# Altium PCB Tigershark 3D R1.7.PcbDoc (part 4 of 4)
Units mil, origin at the board's own origin, x right, y up, seen from the top; angles counter-clockwise.
Board outline 5500 x 4600 mil, 4 copper layers (Top Layer, Groun Plane, Power Plane, Bottom Layer); 303 components, 232 nets, 993 pads, 850 vias.
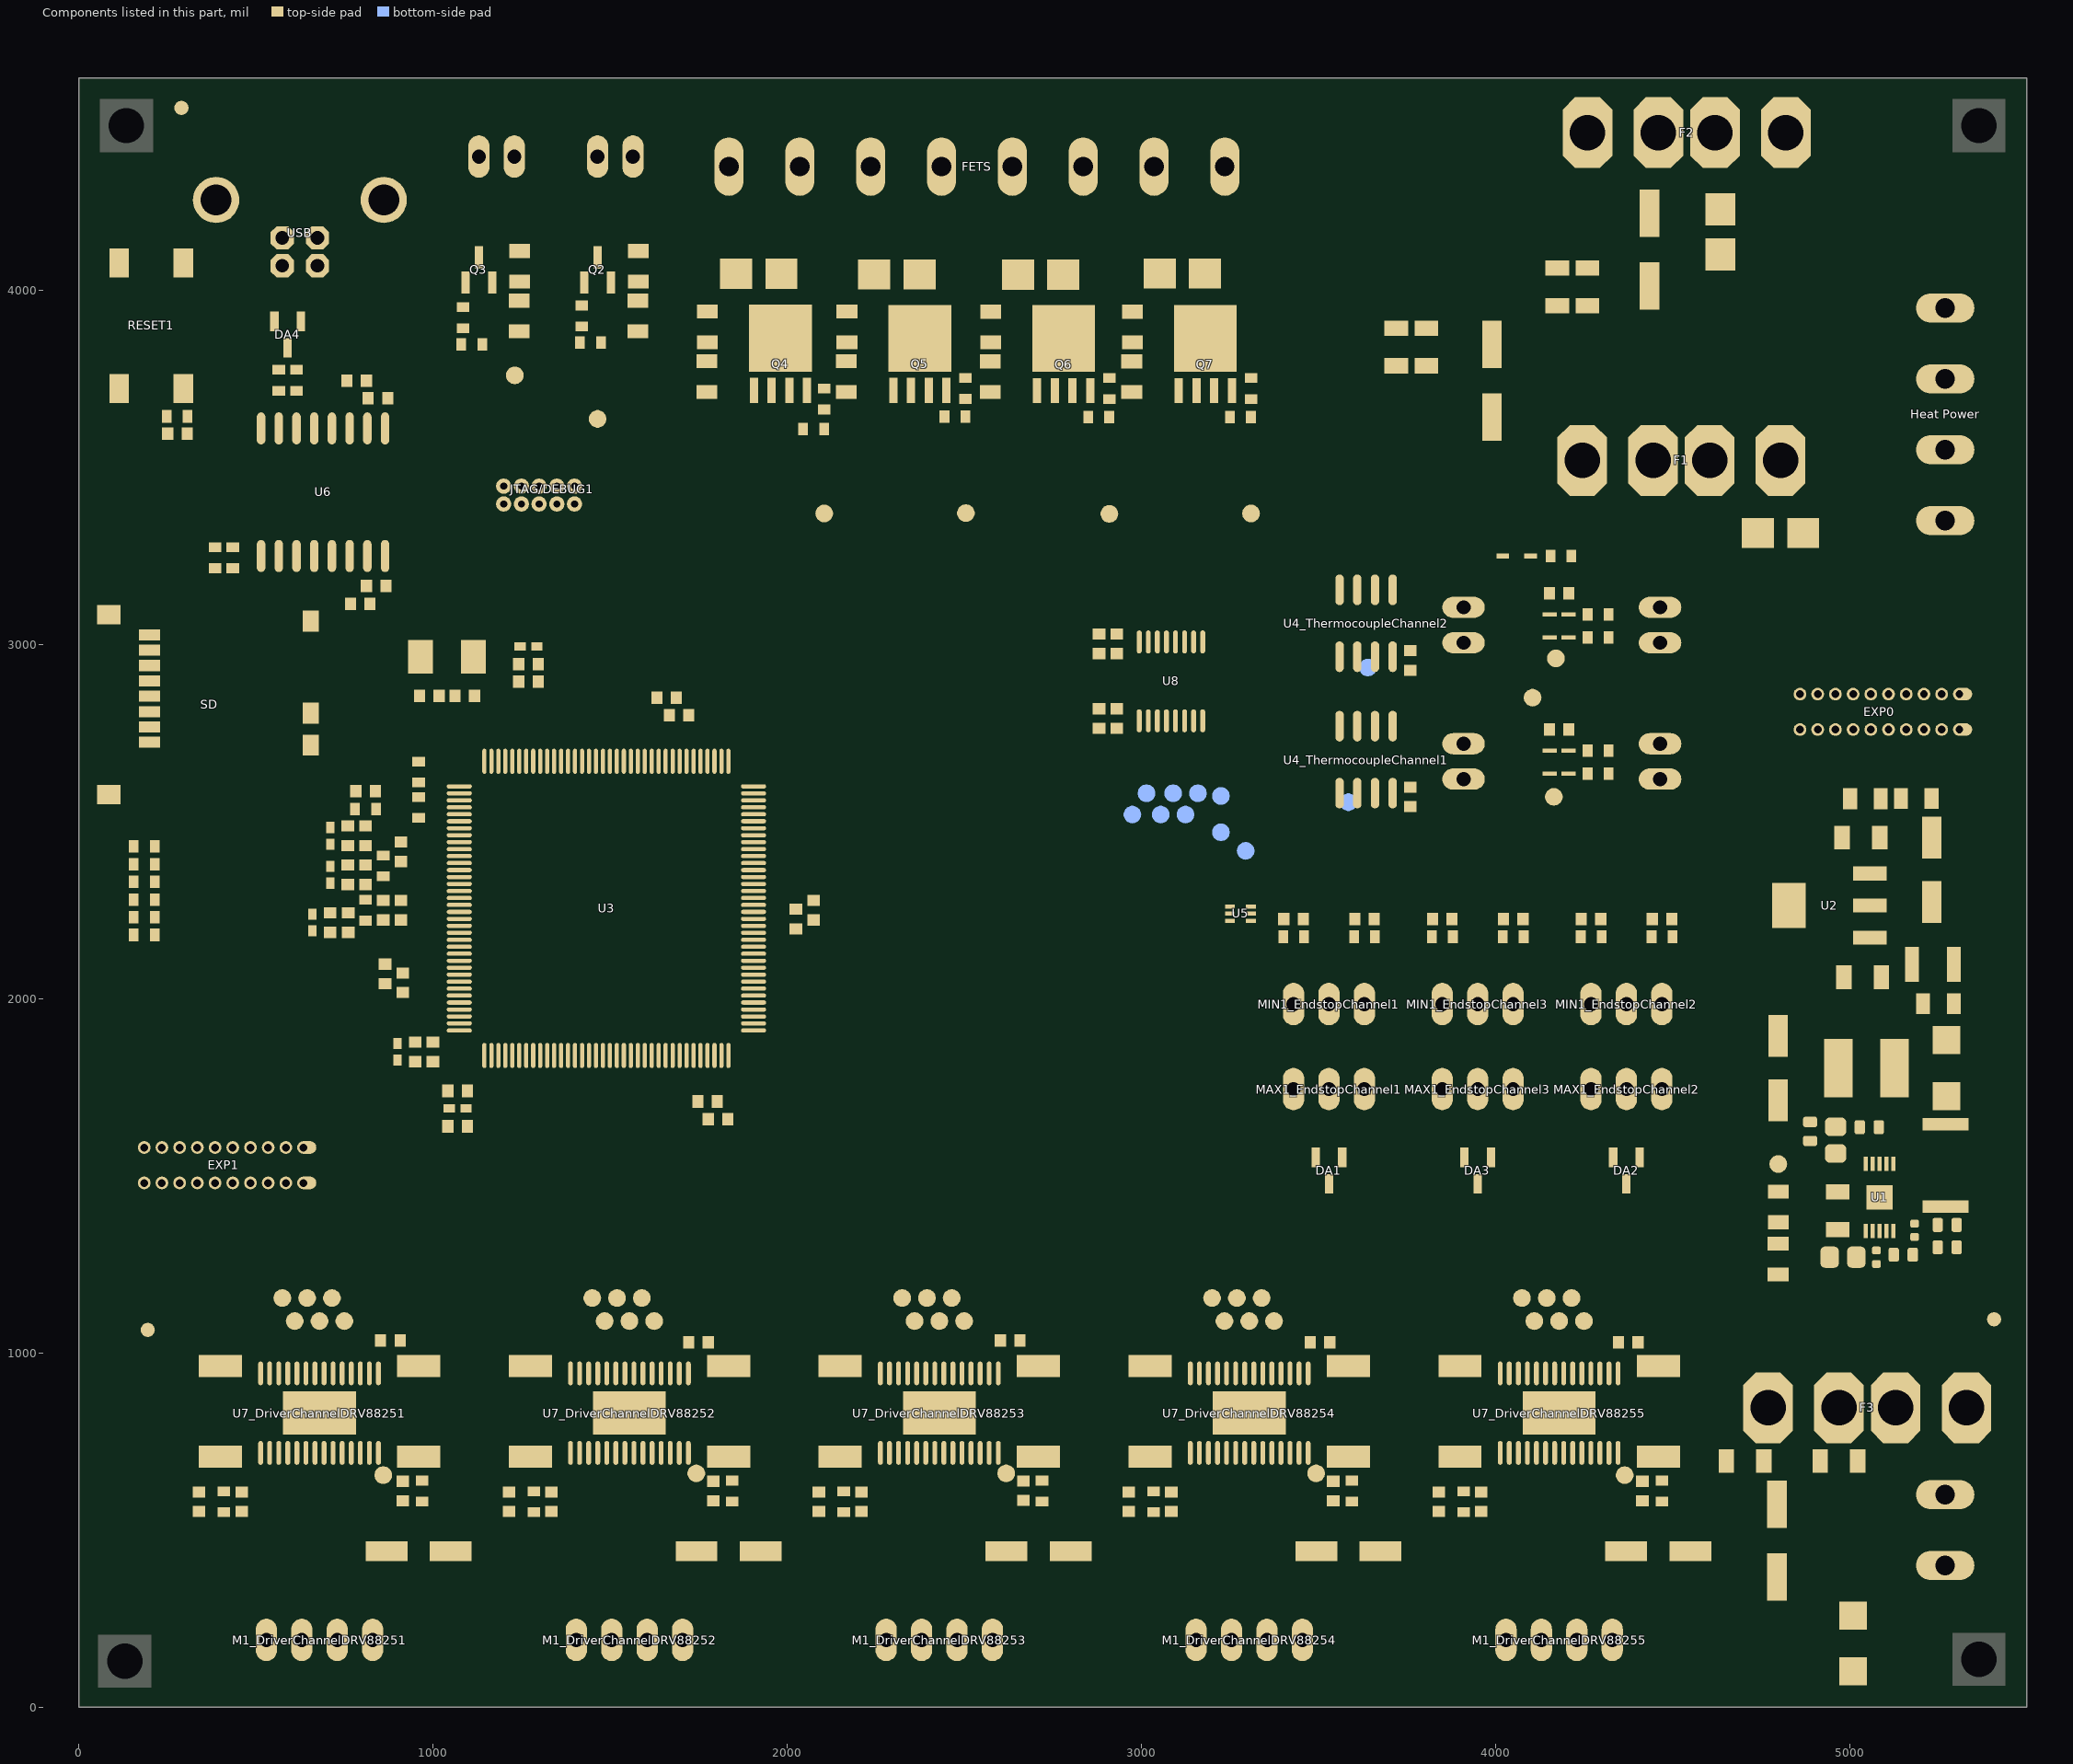
[diagram p6: the components of this part, seen from the top]

## Silkscreen, mask and mechanical layers (free items; w line width, h text height)
Top Overlay:
  lines w10: 40,40 40,220 220,220 220,40 195,40 40,40 ; 45,4375 200,4375 225,4375 225,4555 45,4555 45,4375 ; 5275,45 5455,45 5455,225 5275,225 5275,45 ; 5275,4375 5275,4555 5455,4555 5455,4375 5275,4375
  text "HEATBED" at 4730,4265 h120
  text "FAN-0" at 1025,4173.64 h120
  text "FAN-1" at 1360,4173.64 h120
  text "HEAT-0" at 1775,4125 h100
  text "HEAT-1" at 2160,4124 h100
  text "HEATBED" at 2971,4124.22 h100
  text "HEAT-2" at 2574,4123 h100
  text "HEATERS" at 3466,4065 h130 r90
  text "PWR IN 3" at 5036,3653 h100 r90
  text "12V - 24V" at 5106,3648 h100 r90
  text "AVR" at 75,3360 h160
  text "MOSFETS" at 4125,3335 h120
  text "PWR IN 2" at 5026,3253 h100 r90
  text "12V - 24V" at 5106,3253 h100 r90
  text "Thermocouples" at 3460,3225 h90
  text "Thermistors" at 4270,3220 h90
  text "USB Isolation" at 985,3195 h100 r90
  text "Smart Port" at 4707,2975 h155
  text "Tigershark 3D" at 2005,2350 h220
  text "Prototype Rev 1V7" at 2300,2285 h80
  text "X" at 3455,2255 h300
  text "Y" at 3870,2255 h300
  text "Z" at 4320,2255 h300
  text "Designed By Adam Vadala-Roth" at 2140,2210 h90
  text "3.3V LDO" at 5450,2080 h150 r90
  text "S" at 2450,1860 h2400
  text "G" at 2919,1854 h330
  text "S" at 2090,1835 h210
  text "GPIO Port" at 37,1690 h155
  text "ENDSTOPS" at 3317,1631 h120 r90
  text "MAX / MIN" at 4646,1611 h120 r90
  text "+5V DCDC" at 5460,1355 h150 r90
  text "PWR IN 2" at 5035,329.5 h90 r90
  text "12V - 24V" at 5100,329.5 h90 r90
  text "STEPPER DRIVERS" at 125,250 h130 r90
  text "2.5A Per Phase" at 215,250 h130 r90
  text "X" at 270,45 h300
  text "Y" at 1145,45 h300
  text "Z" at 2020,45 h300
  text "E" at 2890,45 h300
  text "0" at 3585,45 h300
  text "E" at 3780,45 h300
  text "1" at 4460,45 h300
Bottom Overlay:
  text "Tigershark 3D" at 4525,1515 h250
  text "Powered by TinyG" at 4520,1375 h140
  text "Based On the Work of Ultimachine," at 4500,1275 h140
  text "Arduino, RepRap, and Synthetos.com" at 4500,1160 h140
  text "Developed by Adam Vadala-Roth in" at 4500,1045 h140
  text "collaboration with Johnny Russel" at 4500,925 h140
  text "and Alden Hart" at 4500,810 h140
  text "G" at 3795,510 h310
  text "S" at 4195,510 h2000
  text "S" at 4515,490 h175
  text "#YOLO" at 4495,265 h200
Mechanical 15:
  lines w10: 0,0 0,4600 5500,4600 5500,760 5500,400 5500,0 0,0

## Text inside footprints (layer, text, board x,y; h text height)
FAN-1: Mechanical 16 "1" at 1627.5,4440.08 h62 r180
FAN-2: Mechanical 16 "1" at 1292.5,4440.08 h62 r180
FETS: Top Overlay "4" at 2336,4264.22 h77.5; Top Overlay "3" at 2136,4264.22 h77.5; Top Overlay "2" at 1936,4264.22 h77.5; Top Overlay "1" at 1751,4264.22 h77.5; Top Overlay "5" at 2536,4264.22 h77.5; Top Overlay "6" at 2736,4264.22 h77.5; Top Overlay "7" at 2936,4264.22 h77.5; Top Overlay "8" at 3136,4264.22 h77.5
"Heat Power": Top Overlay "4" at 5185,3450 h77.5 r270; Top Overlay "3" at 5185,3650 h77.5 r270; Top Overlay "2" at 5185,3850 h77.5 r270; Top Overlay "1" at 5185,4035 h77.5 r270
MAX1_EndstopChannel1: Mechanical 16 "1" at 3367.5,1682.5 h62
MAX1_EndstopChannel2: Mechanical 16 "1" at 4207.5,1682.5 h62
MAX1_EndstopChannel3: Mechanical 16 "1" at 3787.5,1682.5 h62
MIN1_EndstopChannel1: Mechanical 16 "1" at 3692.5,2047.5 h62 r180
MIN1_EndstopChannel2: Mechanical 16 "1" at 4532.5,2047.5 h62 r180
MIN1_EndstopChannel3: Mechanical 16 "1" at 4112.5,2047.5 h62 r180
"Motor Power": Top Overlay "2" at 5185,500 h77.5 r270; Top Overlay "1" at 5185,685 h77.5 r270
P2_ThermistorChannel1: Mechanical 16 "1" at 4527.5,2557.5 h62 r90
P2_ThermistorChannel2: Mechanical 16 "1" at 4527.5,2942.5 h62 r90
T2_ThermocoupleChannel1: Mechanical 16 "1" at 3972.5,2557.5 h62 r90
T2_ThermocoupleChannel2: Mechanical 16 "1" at 3972.5,2942.5 h62 r90
U3: Top Overlay "TQFP 144" at 1383.05,2352.36 h49.6 r270; Top Overlay "R" at 1438.56,2107.73 h37.2 r270